# Altium PCB GREENLED_PCB.PcbDoc
Units mm, origin at the board's own origin, x right, y up, seen from the top; angles counter-clockwise.
Board outline 45 x 45 mm, 2 copper layers (Top Layer, Bottom Layer); 37 components, 29 nets, 78 pads, 0 vias.
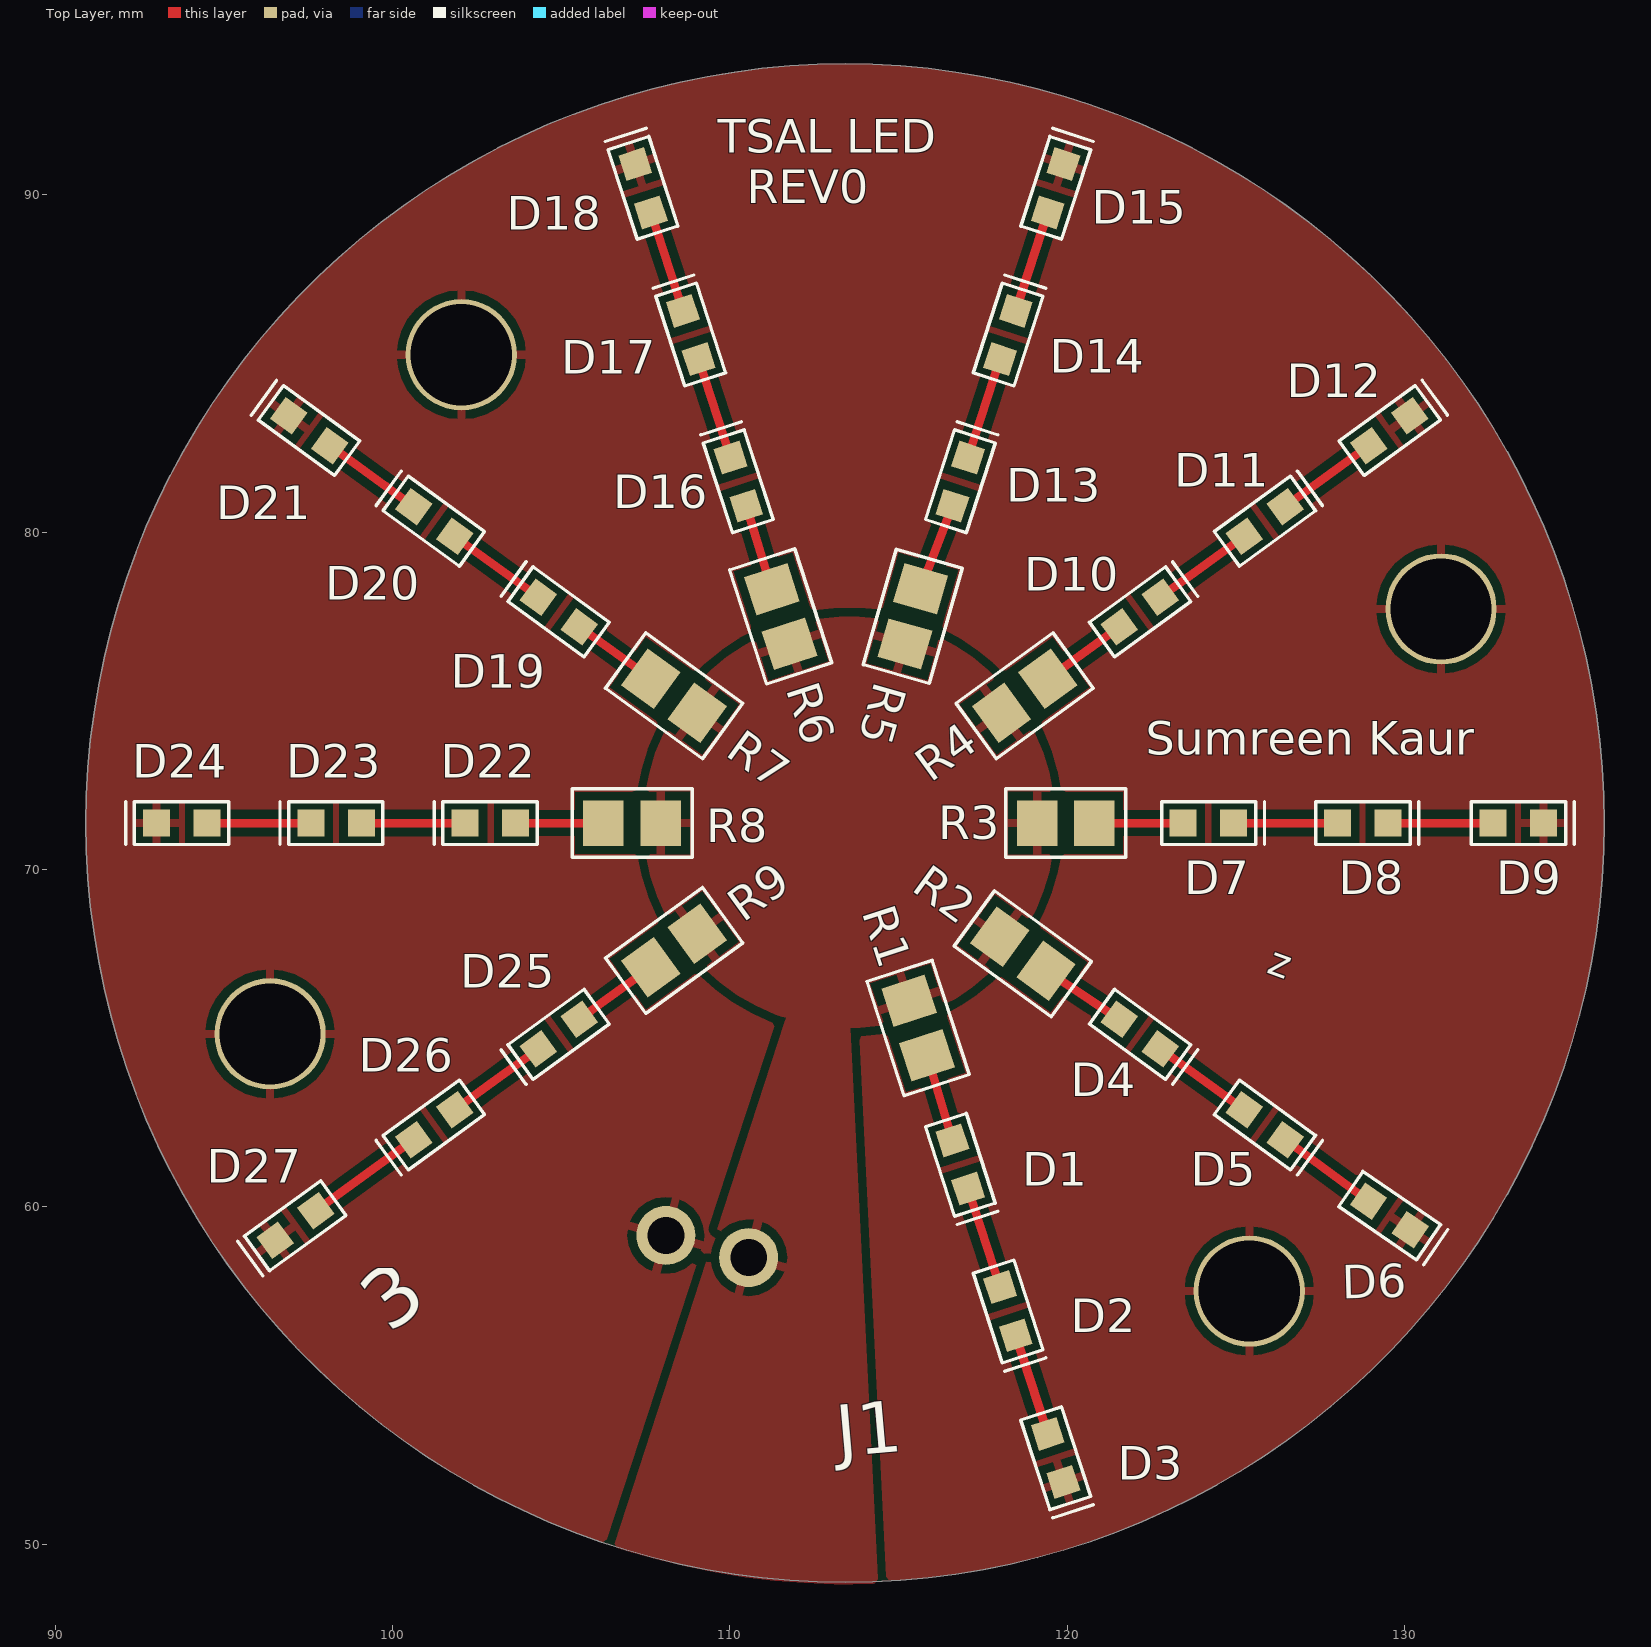
[diagram p0: Top Layer view]
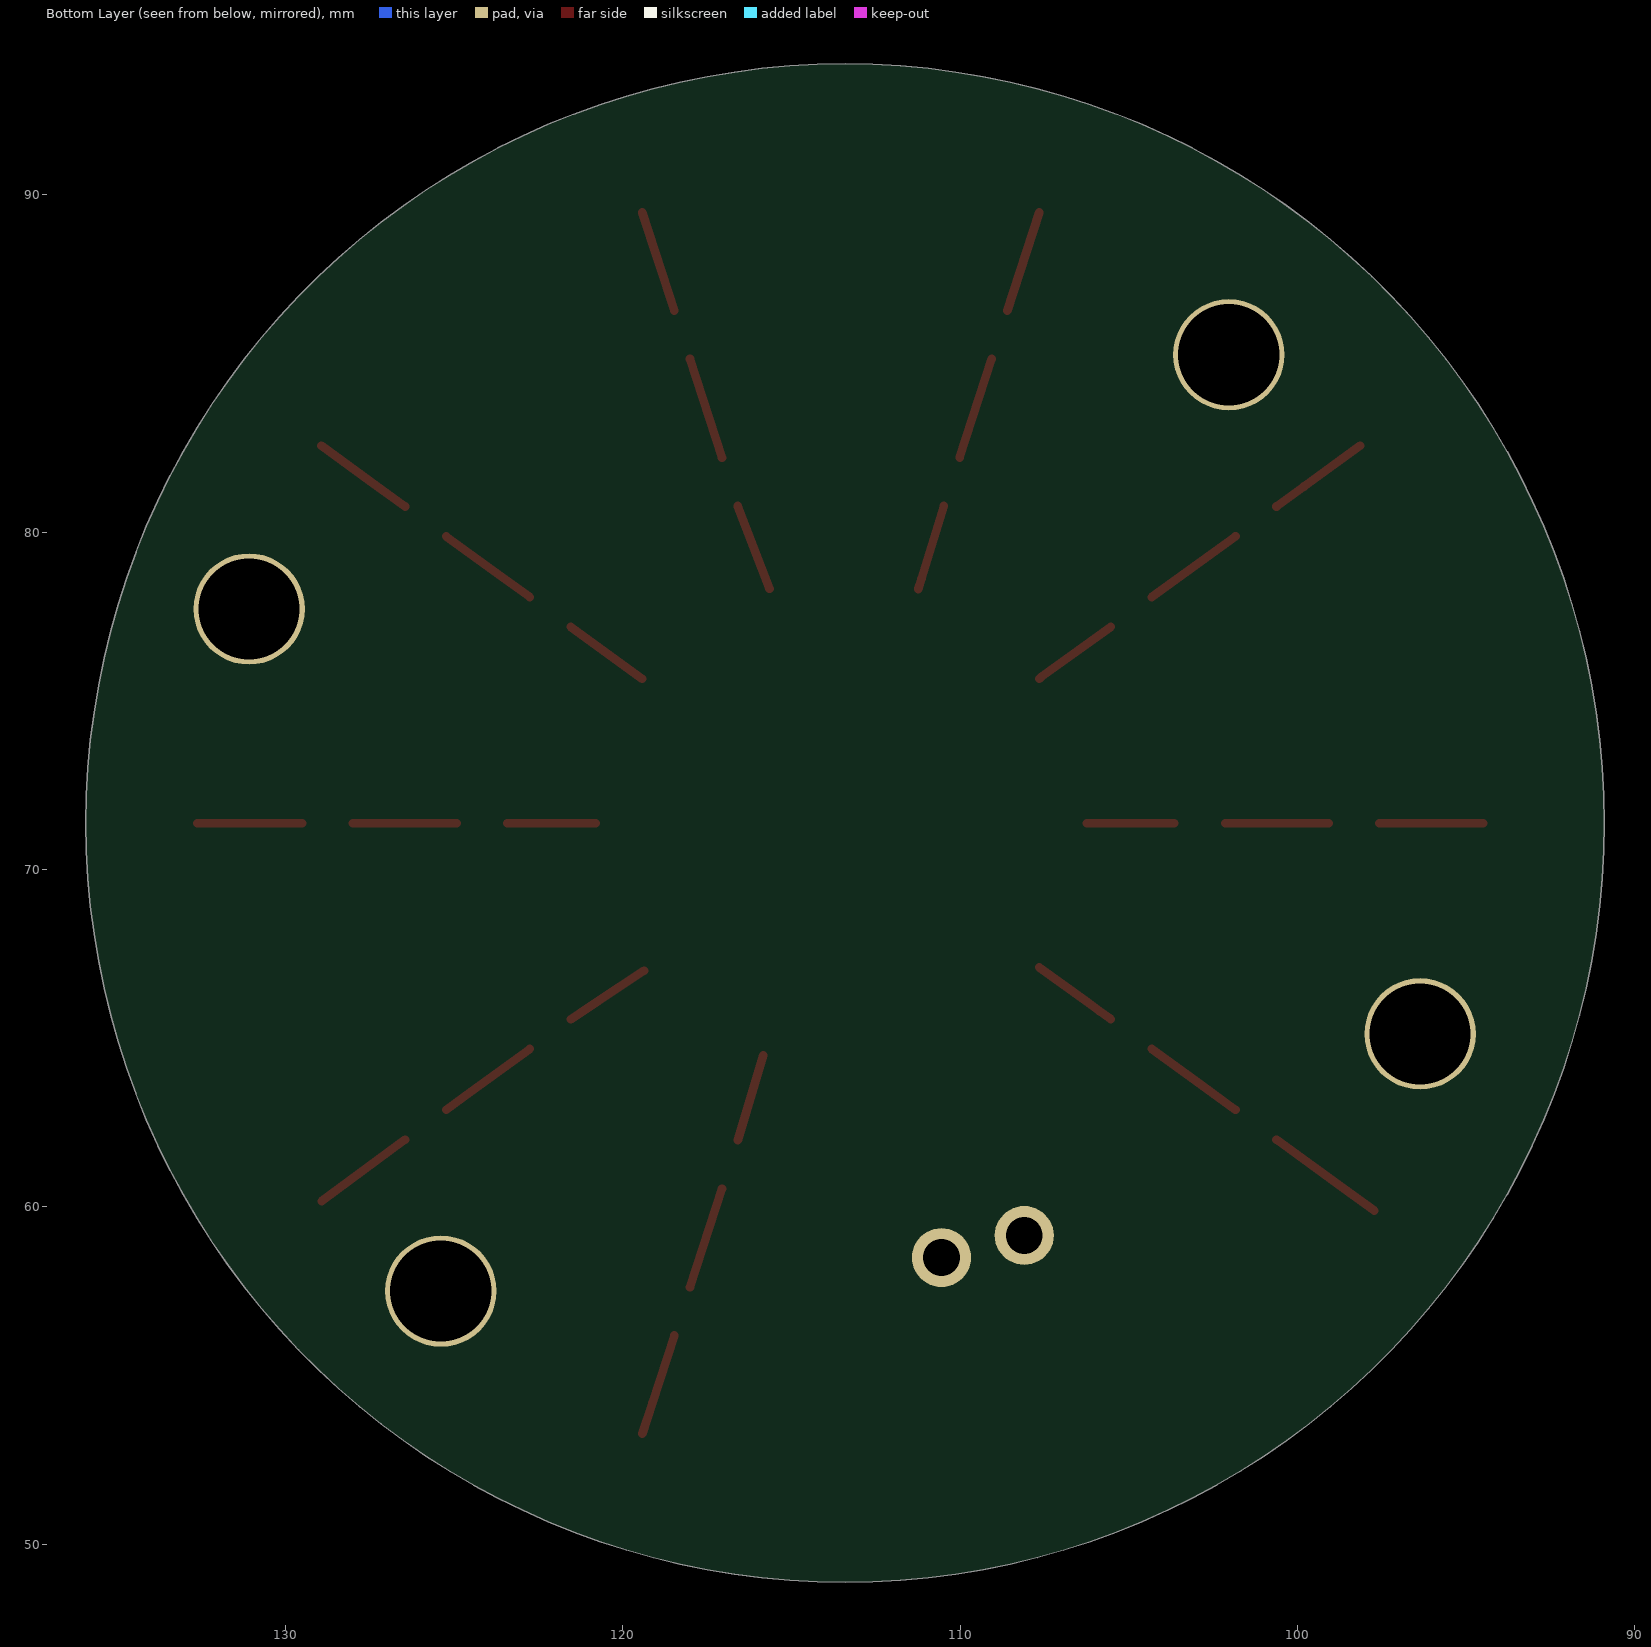
[diagram p1: Bottom Layer view, seen from below]

## Layer stack, top to bottom
Top Solder: solder mask 0.0102, Solder Resist, Dk 3.5
Top Layer: signal copper 0.0356
Dielectric 1: dielectric 0.32, FR-4, Dk 4.8
Bottom Layer: signal copper 0.0356
Bottom Solder: solder mask 0.0102, Solder Resist, Dk 3.5

## Board outline
90.911,71.374 ccw(c113.411,71.374) 113.411,48.874 ccw(c113.411,71.374) 135.911,71.374 ccw(c113.411,71.374) 113.411,93.874 ccw(c113.411,71.374)

## Design rules (kind name [scope] priority, off if disabled: settings)
Clearance [All] p1: gap=0.254 ignorepadtopadclearanceinfootprint=FALSE except(0: Arc-Hole Track-Hole SMDPad-Hole THPad-Hole Via-Hole Fill-Hole Poly-Hole Region-Hole Text-Hole)
PolygonConnect [All] p1: connectstyle=Relief reliefconductorwidth=0.254 reliefentries=4 polygonreliefangle="90 Angle" airgapwidth=0.254
RoutingVias [All] p1: holewidth=0.711 width=1.27 viastyle="Through Hole" minholewidth=0.711 minwidth=1.27 maxholewidth=0.711 maxwidth=1.27
SolderMaskExpansion [All] p1: expansion=0.102
Width [All] p1: maxlimit=0.254 minlimit=0.254 preferedwidth=0.254
30 further rules are at their usual default settings.

## Components (designator, comment, footprint, x,y, rotation, side; value= is the part's Value field where it differs from the comment)
D1 "Green" GREEN_LED 116.83,61.243 r288 top
D2 "Green" GREEN_LED 118.242,56.895 r288 top
D3 "Green" GREEN_LED 119.655,52.547 r288 top
D4 "Green" GREEN_LED 122.156,65.113 r324 top
D5 "Green" GREEN_LED 125.854,62.426 r324 top
D6 "Green" GREEN_LED 129.553,59.738 r325.56 top
D7 "Green" GREEN_LED 124.19,71.374 r0 top
D8 "Green" GREEN_LED 128.762,71.374 r0 top
D9 "Green" GREEN_LED 133.37,71.374 r0 top
D10 "Green" GREEN_LED 122.156,77.635 r36 top
D11 "Green" GREEN_LED 125.854,80.322 r36 top
D12 "Green" GREEN_LED 129.553,83.01 r36 top
D13 "Green" GREEN_LED 116.83,81.505 r72 top
D14 "Green" GREEN_LED 118.242,85.853 r72 top
D15 "Green" GREEN_LED 119.655,90.201 r72 top
D16 "Green" GREEN_LED 110.246,81.505 r108 top
D17 "Green" GREEN_LED 108.834,85.853 r108 top
D18 "Green" GREEN_LED 107.421,90.201 r108 top
D19 "Green" GREEN_LED 104.92,77.635 r144 top
D20 "Green" GREEN_LED 101.222,80.322 r144 top
D21 "Green" GREEN_LED 97.523,83.01 r144 top
D22 "Green" GREEN_LED 102.886,71.374 r180 top
D23 "Green" GREEN_LED 98.314,71.374 r180 top
D24 "Green" GREEN_LED 93.742,71.374 r180 top
D25 "Green" GREEN_LED 104.92,65.113 r216 top
D26 "Green" GREEN_LED 101.222,62.426 r216 top
D27 "Green" GREEN_LED 97.112,59.44 r216 top
J1 "70553-0001" CONNECTOR 108.1,59.151 r345 top
R1 "240ohm" RESISTOR_0805 115.574,65.3 r108 top
R2 "240ohm" RESISTOR_0805 118.68,67.5 r144 top
R3 "240ohm" RESISTOR_0805 119.95,71.374 r180 top
R4 "240ohm" RESISTOR_0805 118.734,75.149 r216 top
R5 "240ohm" RESISTOR_0805 115.417,77.5 r254 top
R6 "240ohm" RESISTOR_0805 111.502,77.5 r288 top
R7 "240ohm" RESISTOR_0805 108.342,75.149 r324 top
R8 "240ohm" RESISTOR_0805 107.1,71.374 r0 top
R9 "240ohm" RESISTOR_0805 108.342,67.599 r36 top

## Footprints (in the part's own frame and the unit in brackets; to place one, negate y for a bottom-side part, rotate by r counter-clockwise, add the part's x,y. Pads: shape width x height; smd on the part's side, far side on the other; paste and mask are expansions set on the pad)
CONNECTOR [mm]
  round 1.75 hole 1.09: 1(2.54,0) 2(0,0)
  body extent -2.42,-12.96 4.97,0.64, height 7.56
GREEN_LED [mm]
  rect 0.8x0.8 smd: 1(-0.762,0) 2(0.738,0)
  silkscreen extent -1.4,-0.64 1.65,0.64
RESISTOR_0805 [mm] "Chip Resistor, 2-Leads, Body 2.00x1.25mm, IPC Medium Density"
  rect 1.2x1.35 smd: 1(-0.85,0) 2(0.85,0)
  silkscreen extent -1.78,-1.02 1.78,1.02, body extent -1.1,-0.68 1.1,0.68, height 0.25

## Part data
D1 D2 D3 D4 D5 D6 D7 D8 D9 D10 D11 D12 D13 D14 D15 D16 D17 D18 D19 D20 D21 D22 D23 D24 D25 D26 D27: library part IN-S63AT5G, "LED GREEN CLEAR 0603 SMD", Manufacturer=Inolux, Supplier Part Number 1=1830-1062-1-ND, ComponentLink1Description=http://www.inolux-corp.com/datasheet/SMDLED/Mono%20Color%20Top%20View/IN-S63AT%20Series_V1.1.pdf?src-supplier=Digi-Key, ComponentLink1URL=http://www.inolux-corp.com/datasheet/SMDLED/Mono%20Color%20Top%20View/IN-S63AT%20Series_V1.1.pdf?src-supplier=Digi-Key, Manufacturer Part Number=IN-S63AT5G, Pricing 1="1 = 0.55000, 10 = 0.39300, 25 = 0.30120, 100 = 0.19660, 250 = 0.14416, 500 = 0.12230, 1000 = 0.10046 (USD)", RoHS=No, Stock 1=2843, Supplier 1=Digi-Key
J1: "Headers & Wire Housings R/A HDR 2P low profile single", Color=Black, Contact Resistance=30mR, Current Rating=3A, Flammability Rating="UL94 V-0", Insulation Resistance=1GR, Manufacturer=Molex, Max Operating Temperature=105°C, Min Operating Temperature=-40°C, Package Quantity=2880, Supplier Part Number 1=WM4900-ND, Voltage Rating=250V, Approvals=UL, ComponentLink1Description=https://datasheet.ciiva.com/5158/0705530001-pcb-headers-172944-5158768.pdf?src-supplier=Mouser, ComponentLink1URL=https://datasheet.ciiva.com/5158/0705530001-pcb-headers-172944-5158768.pdf?src-supplier=Mouser, ComponentLink2Description=https://datasheet.ciiva.com/11746/0900766b80d8d649-11746625.pdf?src-supplier=RSComponents, ComponentLink2URL=https://datasheet.ciiva.com/11746/0900766b80d8d649-11746625.pdf?src-supplier=RSComponents, ComponentLink3Description=https://datasheet.ciiva.com/16657/0705530001-pcb-headers-16657777.pdf?src-supplier=Avnet+Europe, ComponentLink3URL=https://datasheet.ciiva.com/16657/0705530001-pcb-headers-16657777.pdf?src-supplier=Avnet+Europe, ComponentLink4Description=https://datasheet.ciiva.com/7920/ps-70541-7920854.pdf?src-supplier=Element14, ComponentLink4URL=https://datasheet.ciiva.com/7920/ps-70541-7920854.pdf?src-supplier=Element14, ComponentLink5Description=https://datasheet.ciiva.com/30195/179180705530001-pcb-headers-30195548.pdf?src-supplier=Onlinecomponents.com, ComponentLink5URL=https://datasheet.ciiva.com/30195/179180705530001-pcb-headers-30195548.pdf?src-supplier=Onlinecomponents.com, ComponentLink6Description=https://datasheet.ciiva.com/1438/1887076-1438989.pdf?src-supplier=Element14, ComponentLink6URL=https://datasheet.ciiva.com/1438/1887076-1438989.pdf?src-supplier=Element14, ComponentLink7Description=https://datasheet.ciiva.com/10090/0705530001-pcb-headers-10090317.pdf?src-supplier=Avnet, ComponentLink7URL=https://datasheet.ciiva.com/10090/0705530001-pcb-headers-10090317.pdf?src-supplier=Avnet, Contact Material=Bronze, Contact Plating=Gold, ELV=Compliant, Gender=Male, Glow Wire Compliant=Non-compliant, Housing Color=Black, Housing Material=Thermoplastic, Lead Free="Lead Free", Manufacturer Part Number=70553-0001, Material=Brass, Mount="Through Hole", Number of Circuits=2, Number of Contacts=2, Number of Positions=2, Number of Rows=1, Orientation="Right Angle", Packaging=Rail/Tube, Pitch=2.54mm, Pricing 1="1 = 0.71000, 72 = 0.53486, 144 = 0.51264, 504 = 0.44575, 1008 = 0.36775, 5040 = 0.32318, 10008 = 0.30089 (USD)", Radiation Hardening=No, REACH SVHC=Unknown, RoHS=Yes, Stock 1=12201, Supplier 1=Digi-Key, Termination="Through Hole", Voltage Rating (DC)=250V
R1 R2 R3 R4 R5 R6 R7 R8 R9: library part ERA-6AEB241V, "RES SMD 240 OHM 0.1% 1/8W 0805", Case/Package=0805, Case Code (Metric)=2012, Manufacturer=Panasonic, Max Operating Temperature=155°C, Max Power Dissipation=125mW, Min Operating Temperature=-55°C, Package Quantity=1, Resistance=240R, Supplier Part Number 1=P240DACT-ND, Temperature Coefficient=25ppm/°C, Tolerance=0.1%, Voltage Rating=100V, Case Code (Imperial)=0805, ComponentLink1Description=https://datasheet.ciiva.com/29184/452815-da-01-en-widerstand-0805-era-29184072.pdf?src-supplier=Conrad, ComponentLink1URL=https://datasheet.ciiva.com/29184/452815-da-01-en-widerstand-0805-era-29184072.pdf?src-supplier=Conrad, ComponentLink2Description=https://datasheet.ciiva.com/5915/485442-5915205.pdf?src-supplier=Farnell, ComponentLink2URL=https://datasheet.ciiva.com/5915/485442-5915205.pdf?src-supplier=Farnell, ComponentLink3Description=https://datasheet.ciiva.com/30154/54aoa0000ce26-30154486.pdf?src-supplier=Onlinecomponents.com, ComponentLink3URL=https://datasheet.ciiva.com/30154/54aoa0000ce26-30154486.pdf?src-supplier=Onlinecomponents.com, ComponentLink4Description=https://datasheet.ciiva.com/48425/era-eng-tds-48425782.pdf?src-supplier=Distrelec, ComponentLink4URL=https://datasheet.ciiva.com/48425/era-eng-tds-48425782.pdf?src-supplier=Distrelec, ComponentLink5Description=https://datasheet.ciiva.com/5915/485442-5915208.pdf?src-supplier=Farnell, ComponentLink5URL=https://datasheet.ciiva.com/5915/485442-5915208.pdf?src-supplier=Farnell, ComponentLink6Description=https://datasheet.ciiva.com/43455/485442-43455397.pdf?src-supplier=Farnell, ComponentLink6URL=https://datasheet.ciiva.com/43455/485442-43455397.pdf?src-supplier=Farnell, ComponentLink7Description=https://datasheet.ciiva.com/46389/485442-46389960.pdf?src-supplier=Element14, ComponentLink7URL=https://datasheet.ciiva.com/46389/485442-46389960.pdf?src-supplier=Element14, ComponentLink8Description=https://datasheet.ciiva.com/46389/485442-46389961.pdf?src-supplier=Element14, ComponentLink8URL=https://datasheet.ciiva.com/46389/485442-46389961.pdf?src-supplier=Element14, ComponentLink9Description=https://datasheet.ciiva.com/48536/era-eng-tds-48536634.pdf?src-supplier=Distrelec, ComponentLink9URL=https://datasheet.ciiva.com/48536/era-eng-tds-48536634.pdf?src-supplier=Distrelec, ComponentLink10Description=https://datasheet.ciiva.com/22739/485442-22739483.pdf?src-supplier=Element14, ComponentLink10URL=https://datasheet.ciiva.com/22739/485442-22739483.pdf?src-supplier=Element14, ComponentLink11Description=https://datasheet.ciiva.com/17206/aoa0000ce26-17206700.pdf?src-supplier=Avnet+Europe, ComponentLink11URL=https://datasheet.ciiva.com/17206/aoa0000ce26-17206700.pdf?src-supplier=Avnet+Europe, ComponentLink12Description=https://datasheet.ciiva.com/43457/485442-43457869.pdf?src-supplier=Farnell, ComponentLink12URL=https://datasheet.ciiva.com/43457/485442-43457869.pdf?src-supplier=Farnell, Composition="Thin Film", Contact Plating=Tin, Depth=1.25mm, Features="Automotive AEC-Q200", Height=0.5mm, Lead Free="Lead Free", Length=2mm, Manufacturer Part Number=ERA-6AEB241V, Military Standard=Not, Mount="Surface Mount", Number of Pins=2, Number of Terminations=2, Packaging="Tape and Reel", Power Rating=125mW, Pricing 1="1 = 0.36000, 10 = 0.30200, 100 = 0.11820, 1000 = 0.04948, 2500 = 0.04536 (USD)", Radiation Hardening=No, REACH SVHC="No SVHC", RoHS=Yes, Stock 1=47229, Supplier 1=Digi-Key, Termination=Solder, Voltage Rating (DC)=100V, Width=1.25mm

## Free pads (board coordinates)
  round 3.3 hole 3: 2(96.368,65.125) 2(102.037,85.255) 2(125.392,57.503) 2(131.075,77.719)

## Nets (pads, with @x,y where several pads share a name; then routed paths per layer and width w, separated by ;. In a path a pad name is that pad's centre, name@x,y a point inside that pad or via, vN(x,y) a via of type N, cw(c..) or ccw(c..) an arc to the next point about the centre after c; other vN are vias at no path point)
+12V: J1.1 R1.2 R2.2 R3.2 R4.2 R5.2 R6.2 R7.2 R8.2 R9.2
GND: D3.2 D6.2 D9.2 D12.2 D15.2 D18.2 D21.2 D24.2 D27.2 J1.2 pad.2
NetD1_1: D1.1 R1.1 | length 2.6
  Top Layer w0.254: R1.1 D1.1
NetD1_2: D1.2 D2.1 | length 3.1
  Top Layer w0.254: D1.2 D2.1
NetD2_2: D2.2 D3.1 | length 3.1
  Top Layer w0.254: D2.2 119.123,54.186 D3.1
NetD4_1: D4.1 R2.1 | length 2.6
  Top Layer w0.254: R2.1 120.713,66.108 121.27,65.74 D4.1
NetD4_2: D4.2 D5.1 | length 3.1
  Top Layer w0.254: D4.2 124.516,63.398 124.737,63.237 D5.1
NetD5_2: D5.2 D6.1 | length 3.1
  Top Layer w0.254: D5.2 128.923,60.171 D6.1
NetD7_1: D7.1 R3.1 | length 2.6
  Top Layer w0.254: R3.1 D7.1
NetD7_2: D7.2 D8.1 | length 3.1
  Top Layer w0.254: D7.2 D8.1
NetD8_2: D8.2 D9.1 | length 3.1
  Top Layer w0.254: D8.2 D9.1
NetD10_1: D10.1 R4.1 | length 2.6
  Top Layer w0.254: R4.1 D10.1
NetD10_2: D10.2 D11.1 | length 3.1
  Top Layer w0.254: D10.2 123.581,78.67 D11.1
NetD11_2: D11.2 D12.1 | length 3.1
  Top Layer w0.254: D11.2 127.498,81.517 D12.1
NetD13_1: D13.1 R5.1 | length 2.6
  Top Layer w0.254: R5.1 D13.1
NetD13_2: D13.2 D14.1 | length 3.1
  Top Layer w0.254: D13.2 D14.1
NetD14_2: D14.2 D15.1 | length 3.1
  Top Layer w0.254: D14.2 D15.1
NetD16_1: D16.1 R6.1 | length 2.6
  Top Layer w0.254: D16.1 111.145,78.616 R6.1
NetD16_2: D16.2 D17.1 | length 3.1
  Top Layer w0.254: D17.1 D16.2
NetD17_2: D17.2 D18.1 | length 3.1
  Top Layer w0.254: D18.1 D17.2
NetD19_1: D19.1 R7.1 | length 2.6
  Top Layer w0.254: D19.1 107.602,75.701 R7.1
NetD19_2: D19.2 D20.1 | length 3.1
  Top Layer w0.254: D20.1 D19.2
NetD20_2: D20.2 D21.1 | length 3.1
  Top Layer w0.254: D21.1 99.808,81.349 D20.2
NetD22_1: D22.1 R8.1 | length 2.6
  Top Layer w0.254: D22.1 R8.1
NetD22_2: D22.2 D23.1 | length 3.1
  Top Layer w0.254: D23.1 D22.2
NetD23_2: D23.2 D24.1 | length 3.1
  Top Layer w0.254: D24.1 D23.2
NetD25_1: D25.1 R9.1 | length 2.6
  Top Layer w0.254: D25.1 105.869,65.802 106.291,66.108 R9.1
NetD25_2: D25.2 D26.1 | length 3.1
  Top Layer w0.254: D26.1 102.865,63.62 D25.2
NetD26_2: D26.2 D27.1 | length 3.6
  Top Layer w0.254: D27.1 98.628,60.541 D26.2

## Polygon pours and split planes (outlines as drawn)
+12V on Top Layer "Top Layer-+12V" (solid, pour order 8): 106.551,49.927 ccw(c113.538,71.4) 113.538,48.819 ccw(c113.538,71.4) 114.379,48.834 113.563,65.305 ccw(c113.538,71.4) 119.633,71.4 ccw(c113.538,71.4) 113.538,77.495 ccw(c113.538,71.4) 107.443,71.4 ccw(c113.538,71.4) 111.662,65.601
GND on Top Layer "Top Layer-GND" (solid, pour order 15): 90.911,71.374 ccw(c113.411,71.374) 113.411,48.874 ccw(c113.411,71.374) 135.911,71.374 ccw(c113.411,71.374) 113.411,93.874 ccw(c113.411,71.374)

## Silkscreen, mask and mechanical layers (free items; w line width, h text height)
Top Overlay:
  text "TSAL LED /   REV0" at 109.633,89.744 h1
  text "Sumreen Kaur" at 122.324,73.402 h1
  text "z" at 125.774,66.677 h1.5 r340
  text "3" at 100.259,55.763 h3 r37.5
Mechanical 1:
  circle w0.254: c131.075,77.719 r1.5
  circle w0.254: c113.461,71.349 r22.5
  circle w0.254: c113.538,71.4 r6.095
  circle w0.254: c113.538,71.4 r6.613
  lines w0.1: 103.378,71.374 123.378,71.374 ; 106.551,49.927 111.816,66.074 ; 112.587,65.334 112.587,65.369 ; 113.538,60.706 113.538,80.706 ; 113.538,65.802 114.379,48.834 ; 96.354,65.038 125.392,57.503 131.075,77.719 102.037,85.255 96.354,65.038
  lines w0.254: 94.632,65.279 95.121,65.141 ; 94.8,66.815 94.877,65.21 ; 95.778,66.54 94.877,65.21 ; 96.371,70.527 94.877,65.21 ; 99.065,80.109 100.56,85.426 ; 99.658,84.097 100.56,85.426 ; 99.951,47.873 102.417,47.263 ; 100.315,85.495 100.804,85.358 ; 100.636,83.822 100.56,85.426 ; 101.366,47.18 102.417,47.263 ; 101.526,47.827 102.417,47.263 ; 102.356,47.017 102.477,47.51 ; 102.606,86.672 102.734,87.163 ; 103.128,47.016 103.618,46.885 ; 103.31,48.003 103.373,46.951 ; 103.754,48.373 103.373,46.951 ; 103.954,47.83 103.373,46.951 ; 104.018,86.043 102.67,86.918 ; 104.273,87.026 102.67,86.918 ; 106.309,59.197 106.89,60.077 ; 106.509,58.654 106.89,60.077 ; 106.551,49.927 ccw(c113.538,71.4) 114.379,48.835 ; 106.645,60.142 107.135,60.011 ; 106.953,59.024 106.89,60.077 ; 108.883,42.901 109.531,45.357 ; 108.954,44.475 109.531,45.357 ; 109.286,45.422 109.777,45.292 ; 109.389,45.278 109.511,45.772 ; 109.598,44.305 109.531,45.357 ; 110.254,49.09 110.746,48.96 ; 110.341,44.961 109.45,45.525 ; 110.433,50.077 110.5,49.025 ; 110.501,45.609 109.45,45.525 ; 111.078,49.907 110.5,49.025 ; 111.148,51.481 110.5,49.025 ; 111.816,66.074 ccw(c113.538,71.4) 113.538,65.802 ; 111.916,44.916 109.45,45.525 ; 112.249,84.432 102.67,86.918 ; 112.881,68.922 113.538,71.375 ; 112.957,70.495 113.538,71.375 ; 113.293,71.441 113.783,71.309 ; 113.601,70.323 113.538,71.375 ; 116.022,81.628 116.513,81.496 ; 116.205,82.614 116.268,81.562 ; 116.849,82.441 116.268,81.562 ; 116.925,84.015 116.268,81.562 ; 122.13,81.868 131.708,79.382 ; 130.106,79.274 131.708,79.382 ; 130.361,80.257 131.708,79.382 ; 131.645,79.137 131.772,79.628
  text "30 (mm)" at 112.265,83.483 h1.52 r345.45
  text "10.546 (mm)" at 116.111,70.898 h1 r75
  text "21 (mm)" at 97.32,70.524 h1.52 r74.3
  text "13.589 (mm)" at 104.45,48.45 h1 r75
  text "7.245 (mm)" at 100.792,44.977 h1 r346.12
  text "3.794 (mm)" at 111.351,42.028 h1 r75.21
Board Outline:
  circle w0.254: c113.538,71.374 r22.5

## Dimensions
131.075,77.719 to 136.15,80.45 on Mechanical 1